# Altium PCB Over_current.PcbDoc
Units mm, origin at the board's own origin, x right, y up, seen from the top; angles counter-clockwise.
Board outline 50 x 100 mm, 2 copper layers (Top Layer, Bottom Layer); 16 components, 18 nets, 43 pads, 0 vias.
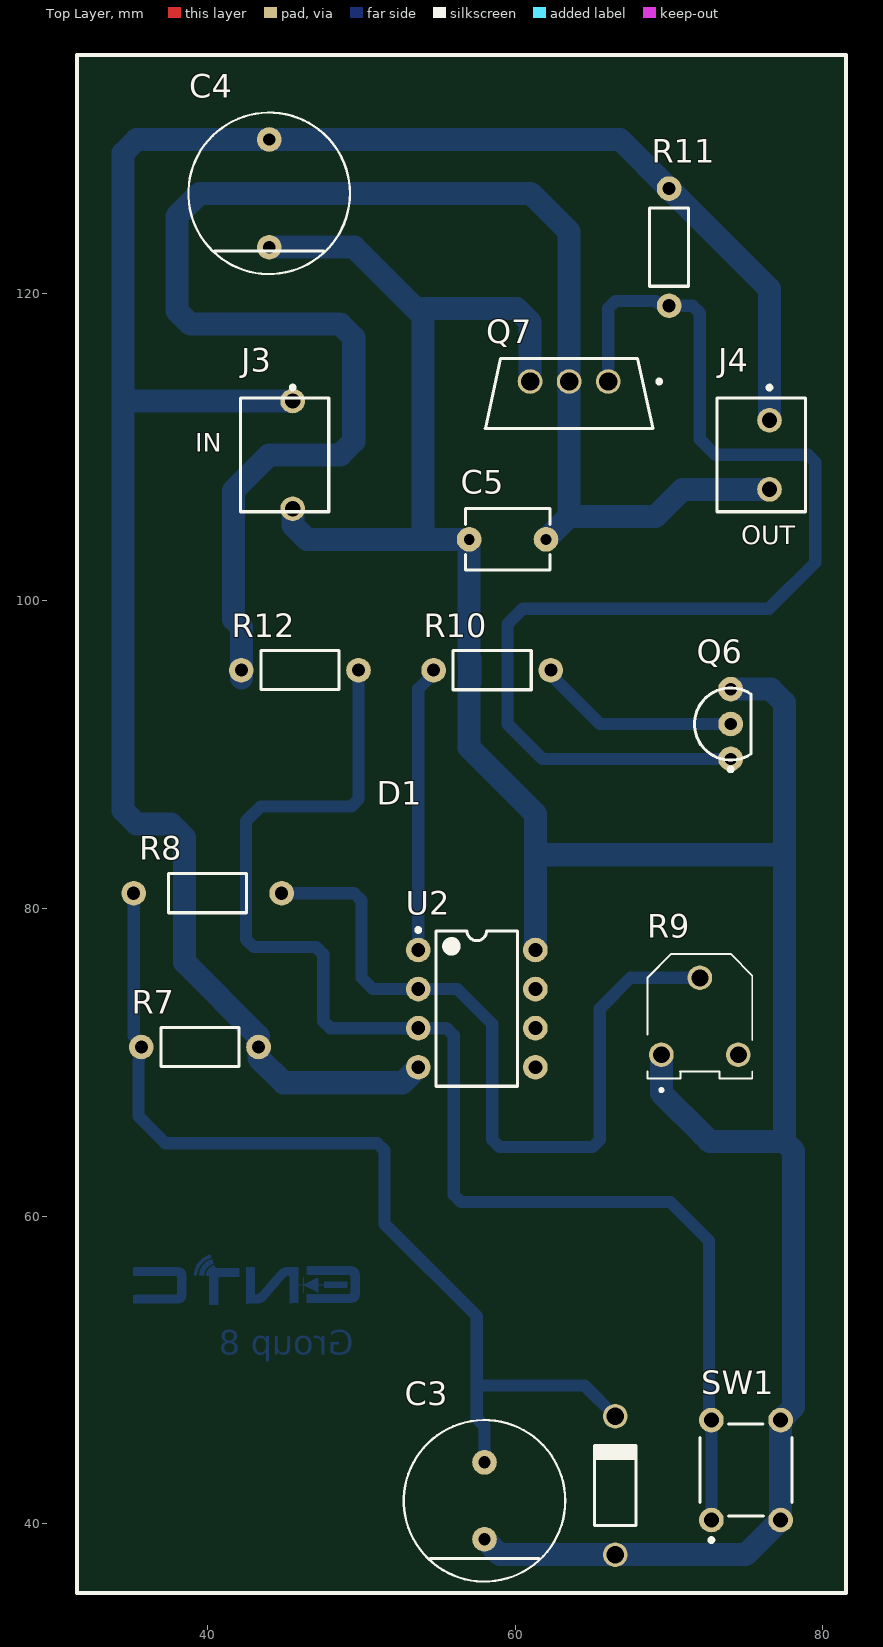
[diagram p0: Top Layer view]
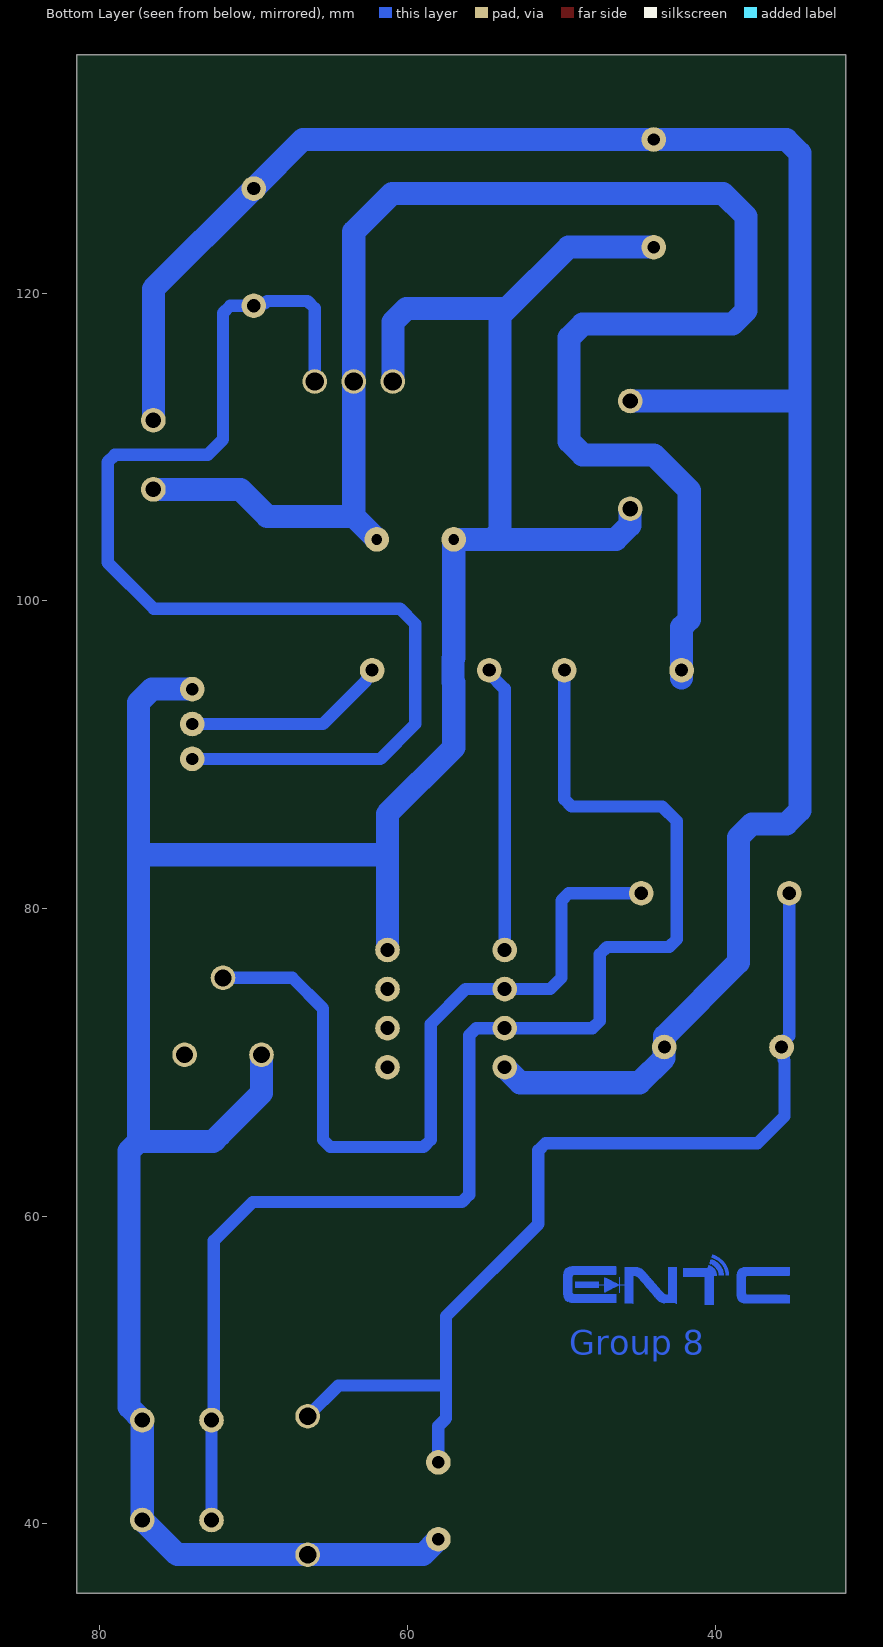
[diagram p1: Bottom Layer view, seen from below]

## Layer stack, top to bottom
Top Solder: solder mask 0.0102, Solder Resist, Dk 3.5
Top Layer: signal copper 0.0356
Dielectric 1: dielectric 0.32, FR-4, Dk 4.8
Bottom Layer: signal copper 0.0356
Bottom Solder: solder mask 0.0102, Solder Resist, Dk 3.5

## Board outline
31.5,35.5 31.5,135.5 81.5,135.5 81.5,35.5

## Design rules (kind name [scope] priority, off if disabled: settings)
Clearance Clearance_power_nets [(InNet('GND') OR InNet('Power_net1') OR InNet('Power_net2'))] p1: gap=0.3 ignorepadtopadclearanceinfootprint=FALSE except(0: Arc-Hole Track-Hole SMDPad-Hole THPad-Hole Via-Hole Fill-Hole Poly-Hole Region-Hole Text-Hole)
Clearance [All] p2: gap=0.254 ignorepadtopadclearanceinfootprint=FALSE except(0: Arc-Hole Track-Hole SMDPad-Hole THPad-Hole Via-Hole Fill-Hole Poly-Hole Region-Hole Text-Hole)
PolygonConnect [All] p1: connectstyle=Relief reliefconductorwidth=0.254 reliefentries=4 polygonreliefangle="90 Angle" airgapwidth=0.254
RoutingVias [All] p1: holewidth=0.711 width=1.27 viastyle="Through Hole" minholewidth=0.711 minwidth=1.27 maxholewidth=0.711 maxwidth=1.27
SolderMaskExpansion [All] p1: expansion=0.102 istentingtop=FALSE
Width Power_nets [(InNet('GND') OR InNet('Power_net1') OR InNet('Power_net2'))] p1: maxlimit=3 minlimit=0.254 preferedwidth=1.5
Width [All] p2: maxlimit=2 minlimit=0.254 preferedwidth=0.8
30 further rules are at their usual default settings.

## Components (designator, comment, footprint, x,y, rotation, side; value= is the part's Value field where it differs from the comment)
C3 "10uF" FP-RAD-TH-D_10_0_5-L_20_2-MFG#1 58,41.5 r90 top
C4 "220uF" FP-RAD-TH-D_10_0_5-L_20_2-MFG#2 44,126.5 r90 top
C5 "22uF" FP-RCEWM1-MFG 59.5,104 r180 top
D1 "1N4738" FAIR-DO-41-2_V 66.5,42.5 r90 top
J3 "In" FP-B2B-XH-A_LF_SN-MFG#1 45,109.5 r270 top
J4 "Out" FP-B2B-XH-A_LF_SN-MFG#2 76,109.5 r270 top
Q6 "P2N2222AG" ONSC-TO-92-3-29-11 74,92 r90 top
Q7 "IRFZ44ZPBF" FP-PG-TO220-3-MFG 63.5,113.5 r270 top
R7 "330 ohm" OMTE-WLA-2_V2#1 39.5,71 r0 top
R8 "1K" OMTE-WLA-2_V2#2 40,81 r180 top
R9 "2K" TRIM_3306F-1-104 72,73 r270 top
R10 "1K" OMTE-WLA-2_V2#1 58.5,95.5 r180 top
R11 "1K" OMTE-WLA-2_V2#1 70,123 r270 top
R12 "10K" OMTE-WLA-2_V2#1 46,95.5 r0 top
SW1 "1825910-6" TECO-1825910-6_V 75,43.5 r90 top
U2 "LM2904N" ONSC-PDIP-8-626-05_M 57.5,73.5 r0 top

## Footprints (in the part's own frame and the unit in brackets; to place one, negate y for a bottom-side part, rotate by r counter-clockwise, add the part's x,y. Pads: shape width x height; smd on the part's side, far side on the other; paste and mask are expansions set on the pad)
FAIR-DO-41-2_V [mm] "2-Leads, Axial leaded, Body 2.72x5.2mm, Pin Spacing 9mm"
  round 1.6 hole 1.15: 1(-4.5,0) 2(4.5,0)
  silkscreen extent -2.6,-1.36 2.6,1.36, body extent -4.93,-1.36 4.93,1.36, height 2.71
FP-B2B-XH-A_LF_SN-MFG#1 [mm]
  round 1.6 hole 1 paste-1000 mask+0: 1(-3.5,0.525) 2(3.5,0.525)
  silkscreen extent -4.5,-2.87 3.7,2.88, body extent -3.8,-2.98 3.8,2.98, height 0.25
FP-B2B-XH-A_LF_SN-MFG#2 [mm]
  round 1.6 hole 1 paste-1000 mask+0: 1(-2.25,0.525) 2(2.25,0.525)
  silkscreen extent -4.5,-2.87 3.7,2.88, body extent -3.8,-2.98 3.8,2.98, height 0.25
FP-PG-TO220-3-MFG [mm]
  round 1.6 hole 1.2 paste-1000 mask+0: 1(-0.767,2.54) 2(-0.767,0) 3(-0.767,-2.54)
  silkscreen extent -2.27,-5.45 2.27,5.98, body extent -2.37,-5.55 2.37,5.55, height 0.25
FP-RAD-TH-D_10_0_5-L_20_2-MFG#1 [mm]
  round 1.6 hole 0.8 paste-1000 mask+0: 1(-2.5,0) 2(2.5,0)
  silkscreen extent -5.25,-5.25 5.25,5.25, body extent -5.35,-5.35 5.35,5.35, height 0.25
FP-RAD-TH-D_10_0_5-L_20_2-MFG#2 [mm]
  round 1.6 hole 0.8 paste-1000 mask+0: 1(-3.5,0) 2(3.5,0)
  silkscreen extent -5.25,-5.25 5.25,5.25, body extent -5.35,-5.35 5.35,5.35, height 0.25
FP-RCEWM1-MFG [mm]
  round 1.6 hole 0.7 paste-1000 mask+0: 1(-2.5,0) 2(2.5,0)
  silkscreen extent -2.75,-2 2.75,2, body extent -3.2,-2.1 3.2,2.1, height 0.25
OMTE-WLA-2_V2#1 [mm] "2-Leads, Axial leaded, Body 2.54x5.08mm, Pin Spacing 7.62mm"
  round 1.6 hole 0.85: 1(-3.81,0) 2(3.81,0)
  silkscreen extent -2.54,-1.27 2.54,1.27, body extent -4.11,-1.26 4.11,1.27, height 2.54
OMTE-WLA-2_V2#2 [mm] "2-Leads, Axial leaded, Body 2.54x5.08mm, Pin Spacing 7.62mm"
  round 1.6 hole 0.85: 1(-4.81,0) 2(4.81,0)
  silkscreen extent -2.54,-1.27 2.54,1.27, body extent -4.11,-1.26 4.11,1.27, height 2.54
ONSC-PDIP-8-626-05_M [mm] "DIP, 8-Leads, Body 10x7.1mm, Pitch 2.54mm"
  round 1.6 hole 0.9: 1(-3.81,3.81) 2(-3.81,1.27) 3(-3.81,-1.27) 4(-3.81,-3.81) 5(3.81,-3.81) 6(3.81,-1.27) 7(3.81,1.27) 8(3.81,3.81)
  silkscreen extent -3.93,-5.05 2.65,5.23, body extent -3.95,-5 3.95,5, height 5.33
ONSC-TO-92-3-29-11 [mm] "TO, 3-Leads, Body Dia 4.7mm, Pitch 1.27mm"
  round 1.6 hole 0.8: 1(-2.27,0) 2(0,0) 3(2.27,0)
  silkscreen extent -3.07,-1.34 2.35,2.35, body extent -2.35,-1.33 2.36,2.36, height 7.87
TECO-1825910-6_V [mm] "Switch, 4-Leads, Body 5.99x5.99mm"
  round 1.6 hole 0.99: 1(-3.25,2.25) 2(3.25,2.25) 3(-3.25,-2.25) 4(3.25,-2.25)
  silkscreen extent -4.67,-2.99 2.99,3, body extent -3,-2.99 2.99,3, height 5
TRIM_3306F-1-104 [mm]
  round 1.6 hole 1.1: 1(2.5,-2.5) 2(-2.5,0) 3(2.5,2.5)
  silkscreen extent -4.05,-3.41 4.9,3.41, body extent -3.2,-1.6 3.2,1.6, height 0.75

## Part data
C3: library part CMP-05427-001613-1, "Aluminum Electrolytic Capacitors (Radial Lead Type) 10uF ±20% 400V", Case/Package=Radial, Dielectric Material=Aluminium, Max Operating Temperature=105°C, Min Operating Temperature=-25°C, Package Quantity=200, Ripple Current=300mA, Tolerance=20%, Voltage=400V, Capacitance=10uF, Construction=RADIAL, Contact Plating=Tin, Diameter=10mm, Dissipation Factor=0.24%, Height=20mm, Height - Seated (Max)=0.787inch, Lead Diameter=0.6mm, Lead Free="Lead Free", Lead Pitch=5mm, Length=20mm, Life (Hours)=8000Hour, Mount="Through Hole", Number of Pins=2, Packaging=Bulk, Polarity=Polar, Radiation Hardening=No, REACH SVHC="No SVHC", Ripple Current (AC)=300mA, RoHS Compliant=Yes, Series=ED, Termination=Radial, Voltage Rating=400V, Voltage Rating (DC)=400V
C4: library part CMP-05427-001613-1, "Aluminum Electrolytic Capacitors (Radial Lead Type) 10uF ±20% 400V", Capacitance=10uF, Case/Package=Radial, Dielectric Material=Aluminium, Max Operating Temperature=105°C, Min Operating Temperature=-25°C, Package Quantity=200, Ripple Current=300mA, Tolerance=20%, Voltage=400V, Construction=RADIAL, Contact Plating=Tin, Diameter=10mm, Dissipation Factor=0.24%, Height=20mm, Height - Seated (Max)=0.787inch, Lead Diameter=0.6mm, Lead Free="Lead Free", Lead Pitch=5mm, Length=20mm, Life (Hours)=8000Hour, Mount="Through Hole", Number of Pins=2, Packaging=Bulk, Polarity=Polar, Radiation Hardening=No, REACH SVHC="No SVHC", Ripple Current (AC)=300mA, RoHS Compliant=Yes, Series=ED, Termination=Radial, Voltage Rating=400V, Voltage Rating (DC)=400V
C5: library part CMP-06035-003622-1, "CAP CER 22UF 25V X7R RADIAL", Case/Package=Radial, Dielectric=X7R, Max Operating Temperature=125°C, Min Operating Temperature=-55°C, Package Quantity=1500, Ratings=AEC-Q200, Resistor Type=Ceramic, Tolerance=20%, Voltage Rating=25V, Capacitance=22uF, Height=7.5mm, Height - Seated (Max)=0.295inch, Lead Diameter=0.5mm, Lead Pitch=0.197inch, Lead/Base Style="Formed Leads", Length=0.217inch, Mount="Through Hole", Packaging="Tape and Reel", Termination=Radial, Voltage Rating (DC)=25V, Width=0.157inch
D1: library part CMP-0892-00030-1, "Zener Diode, 4.7V, 1W, 5%, -65 to 200 degC, 2-Pin DO-41, Body 2.72 x 5.2 mm, RoHS", Manufacturer="Fairchild Semiconductor", Operating and Storage Temperature Range="-65 to 200 degC", PartNumber=1N4732A, Test Current IZ (mA)=53, Tolerance=5%, ComponentLink1Description="Manufacturer URL", ComponentLink1URL=http://www.fairchildsemi.com/, ComponentLink2Description=Datasheet, ComponentLink2URL=http://www.fairchildsemi.com/ds/1N/1N4744A.pdf, ComponentLink3Description="Package Specification", ComponentLink3URL=http://www.fairchildsemi.com/dwg/DO/DO41A.pdf, DatasheetVersion="Rev. H3", IR (uA)=10, Mounting Technology="Through Hole", PackageDescription="2-Pin Axial leaded, Body 2.72 x 5.2 mm, Lead Spread 25.4 mm", PackageReference=DO-41-2, PackageVersion="Rev. 2", PD (W)=1, RoHS=TRUE, VZ (Max.) (V)=4.935, VZ (Min.) (V)=4.465, ZZ (Max) (ohm)=8
J3 J4: library part CMP-2000-05888-3, "CONN HEADER VERT 2POS 2.5MM", Color=Natural, Contact Resistance=20mR, Current Rating=3A, Housing Color=White, Insulation Resistance=1GR, Max Operating Temperature=85°C, Max Voltage Rating (AC)=250V, Min Operating Temperature=-25°C, Connector Type="Male Pin", Contact Material=Brass, Contact Plating=Tin, Contact Type="Male Pin", Depth=5.75mm, Fastening Type=Detent, Housing Material=Polyamide, Lead Free="Lead Free", Lead Pitch=2.5mm, Length=7.4mm, Max Current Rating=3A, Max Voltage Rating (DC)=250V, Mount="Through Hole", Number of Contacts=2, Number of Positions=2, Number of Rows=1, Orientation=Straight, Packaging=Bulk, Pitch=2.5mm, REACH SVHC="No SVHC", Series=XH, Termination=Solder, Voltage Rating=250V, Voltage Rating (AC)=250V, Wire/Cable Gauge=22AWG
Q6: library part CMP-1048-01402-1, "Amplifier Transistor, NPN Silicon, 3-Pin TO-92, Pb-Free, Bulk Box", Manufacturer="On Semiconductor", ComponentLink1Description="Manufacturer URL", ComponentLink1URL=http://www.onsemi.com/, ComponentLink2Description=Datasheet, ComponentLink2URL=http://www.onsemi.com/pub_link/Collateral/P2N2222A-D.PDF, ComponentLink3Description="Package Specification", ComponentLink3URL=http://www.onsemi.cn/pub_link/Collateral/2N6426-D.PDF, DatasheetVersion="Rev. 7", fT Min (MHz)=300, IC Continuous (A)=0.6, Mounting Technology="Through Hole", PackageDescription="3-Pin Transistor Outline, Body 4.825 x 3.685 mm, Pitch 1.27 mm", PackageReference=TO-92-3-29-11_AM_SL, PackageVersion="Rev. AM", Packing="Bulk Box", PartNumber=P2N2222AG, Polarity=NPN, RoHS=TRUE
Q7: library part CMP-32901-000501-1, "MOSFET N-CH 55V 51A TO220AB", Case/Package=TO-220, Continuous Drain Current (ID)=51A, Drain to Source Breakdown Voltage=55V, Drain to Source Resistance=13.9mR, Gate to Source Voltage (Vgs)=20V, Input Capacitance=1.42nF, Max Operating Temperature=175°C, Max Power Dissipation=80W, Min Operating Temperature=-55°C, Threshold Voltage=4V, Drain to Source Voltage (Vdss)=55V, Halogen Free="Halogen Free", Height=0.38inch, Lead Free="Lead Free", Length=0.42inch, Max Dual Supply Voltage=55V, Mount="Through Hole", Number of Pins=3, Packaging=Rail/Tube, Power Dissipation=80W, Rds On Max=13.9mR, REACH SVHC="No SVHC", RoHS Compliant=Yes, Turn-Off Delay Time=33ns, Turn-On Delay Time=14ns, Width=0.19inch
R7 R8 R10 R11 R12: library part CMP-1237-00001-1, "Miniature Wirewound Current Sense, 0.02 Ohm +/-1%, 0.5 W, 2-Pin THD, RoHS, 25pc Pack", Manufacturer=Ohmite, PartNumber=WLAR020FE, Power Rating="0.5 W", Rated Resistance="0.02 Ohm", Resistance Tolerance=+/-1%, ComponentLink1Description="Manufacturer URL", ComponentLink1URL=http://www.ohmite.com/, ComponentLink2Description=Datasheet, ComponentLink2URL=http://www.ohmite.com/cat/res_wl.pdf, ComponentLink3Description="Package Specification", ComponentLink3URL=http://www.ohmite.com/cat/res_wl.pdf, DatasheetVersion=May-14, Mounting Technology="Through Hole", PackageDescription="2-Pin Axial Lead, Body 5.08 x 2.54 mm, Lead Spread 25 mm", Packing="25pc Pack", RoHS=TRUE
R9: library part 3306F-1-104, "100 kOhms 0.2W, 1/5W PC Pins Through Hole Trimmer Potentiometer Cermet 1 Turn Top Adjustment", Package="6432 Bourns", Availability=Unavailable, Check_prices=https://www.snapeda.com/parts/3306F-1-104/Bourns/view-part/372285/?ref=eda, MF=Bourns, MP=3306F-1-104, Price=None, SnapEDA_Link=https://www.snapeda.com/parts/3306F-1-104/Bourns/view-part/372285/?ref=snap
SW1: library part CMP-1684-00021-1, "Tact Switch, SPST-NO, 0.05 A, -35 to 85 degC, 4-Pin THD, RoHS, Bulk", Actuator Color=Black, Contact Rating @ Voltage=0.05A@24VDC, Dielectric Strength=500VAC, Manufacturer="TE Connectivity", Maximum AC Voltage Rating=N/A, Maximum Contact Resistance=100mOhm, Maximum DC Voltage Rating=24V, Minimum Insulation Resistance=100MOhm, Operating Temperature=-35to85C, Package Description="4-Pin Through Hole Device, Body 5.99 x 5.99 mm, Pitch 6.5 mm", Package Reference=THD, Actuator Length=1.4mm, Actuator Material=PolybutyleneTerephthalate, Actuator Style=RoundButton, Base Material=N/A, Body Orientation=Straight, Bushing Type=Unthreaded, Contact Material=CopperAlloy, Contact Plating=Silver, Datasheet URL=http://www.te.com/commerce/DocumentDelivery/DDEController?Action=showdoc&DocId=Customer+Drawing%7F1825910%7FC9%7Fpdf%7FEnglish%7FENG_CD_1825910_C9.pdf%7F1825910-6, Datasheet Version="Rev. C9", Dimension=5.99x5mm, Electrical Life=100000Cycles, Family=1825910, Function=MomentaryContact, Housing Material=N/A, Illumination=N/R, Manufacturer URL=http://www.te.com, Mechanical Life=100000Cycles, Mounting=ThroughHole, Packaging=N/A, Part No=1825910-6, Pole Throw Configuration=SPST, Product Weight=N/A, RoHS=Yes, Seal Description=N/A, Seal Location=N/A, Switch Configuration=OFF(ON), Terminal Type=PCPins, Thread Size=N/R
U2: library part CMP-1310-00111-1, "Single Supply Dual Operational Amplifier, 3 to 32 V, -40 to 105 degC, 8-Pin PDIP, Tube", Manufacturer="On Semiconductor", ComponentLink1Description="Manufacturer URL", ComponentLink1URL=http://www.onsemi.com/, ComponentLink2Description=Datasheet, ComponentLink2URL=http://www.onsemi.cn/pub_link/Collateral/LM358-D.PDF, ComponentLink3Description="Package Specification", ComponentLink3URL=http://www.onsemi.com/pub_link/Collateral/LM211-D.PDF, DatasheetVersion="Rev. 27", Mounting Technology="Through Hole", PackageDescription="8-Pin Plastic Dual-In Line Package, Body 9.52 x 6.605 mm, Pitch 2.54 mm", PackageReference=PDIP-8-626-05, PackageVersion="Rev. M, 04/2010", Packing=Tube, PartNumber=LM2904N, RoHS=FALSE, VCC Max (V)=32, VCC Min (V)=3

## Nets (pads, with @x,y where several pads share a name; then routed paths per layer and width w, separated by ;. In a path a pad name is that pad's centre, name@x,y a point inside that pad or via, vN(x,y) a via of type N, cw(c..) or ccw(c..) an arc to the next point about the centre after c; other vN are vias at no path point)
GND: C3.1 C4.1 C5.2 D1.1 J3.2 Q6.3 Q7.3 R9.1 SW1.3 SW1.4 U2.8 | length 185.9
  Bottom Layer w1.5: C4.1@44.046,123 49.54,123 53.54,119 ; J3.2 45.544,105.981 45.544,104.91 46.454,104 54.5,104 ; C3.1 59,38 D1.1@66.473,38 ; Q7.3 60.96,118.121 60.081,119 53.54,119 ; U2.8 61.31,83.69 ; D1.1 66.519,38.019 69.781,38.019 69.8,38 74.973,38 77.223,40.25 SW1.3 SW1.4 78.1,47.6 78.1,64.251 77.5,64.851 ; R9.1 69.5,68 72.21,65.29 72.649,64.851 77.5,64.851 ; Q6.3@74.031,94.266 76.621,94.266 77.5,93.387 77.5,83.5 ; 53.54,119 54,118.54 54,104.5 54.5,104 ; 54.5,104 C5.2 57,96.306 57.04,96.266 57.04,94.734 57,94.694 57,90.466 61.31,86.156 61.31,83.69 ; 61.31,83.69 61.5,83.5 77.5,83.5 ; 77.5,64.851 77.5,83.5
NetC3_2: C3.2 D1.2 R7.1 R8.2 | length 64.5
  Bottom Layer w0.8: R8.2 35.19,71.717 35.69,71.216 R7.1 35.537,70.847 35.537,70.168 35.5,70.131 35.5,66.5 37.25,64.75 51.031,64.75 51.5,64.281 51.5,59.5 57.5,53.5 57.5,49 ; C3.2 58,46.358 57.5,46.858 57.5,49 ; D1.2 64.5,49 57.5,49
NetQ1_2: 
NetQ1_3: 
NetQ2_3: 
NetQ4_2: 
NetQ5_2: 
NetQ6_1: Q6.1 Q7.1 R11.2 | length 77.5
  Bottom Layer w0.8: Q7.1 66.04,119.031 66.509,119.5 69.131,119.5 69.288,119.343 R11.2@69.847,119.343 ; R11.2 71.531,119.19 72,118.721 72,110.5 73,109.5 79.031,109.5 79.5,109.031 79.5,102.5 76.5,99.5 60.5,99.5 59.5,98.5 59.5,92 61.77,89.73 Q6.1
NetQ6_2: Q6.2 R10.1 | length 13.3
  Bottom Layer w0.8: R10.1 62.31,95.284 62.71,94.884 62.71,94.79 65.5,92 Q6.2
NetR3_1: 
NetR8_1: R8.1 R9.2 U2.2 | length 50.9
  Bottom Layer w0.8: R8.1 49.531,81 50,80.531 50,75.5 50.73,74.77 U2.2 56.23,74.77 58.5,72.5 58.5,64.969 58.969,64.5 65.031,64.5 65.5,64.969 65.5,73.5 67.5,75.5 R9.2
NetR10_2: R10.2 U2.1 | length 18.6
  Bottom Layer w0.8: U2.1 53.69,94.284 54.69,95.284 R10.2
Power_line_Reg: 
Power_line_Un_reg: 
Power_net1: C4.2 J3.1 J4.1 R7.2 R11.1 U2.4 | length 141.2
  Bottom Layer w1.5: 34.5,113 J3.1 ; R7.2 43.291,71.019 43.291,71.709 38.5,76.5 38.5,84.621 37.621,85.5 35.379,85.5 34.5,86.379 34.5,111.75 34.5,112.379 34.5,129.121 35.379,130 C4.2 66.81,130 R11.1 76.525,120.285 J4.1 ; R7.2@43.311,71 43.329,70.982 43.329,70.282 44.934,68.678 52.678,68.678 U2.4
Power_net2: C5.1 J4.2 Q7.2 R12.1 | length 108.1
  Bottom Layer w1.5: R12.1@42.19,95 R12.1 42.19,98.3 41.69,98.8 41.69,107.19 44,109.5 48.621,109.5 49.5,110.379 49.5,117.121 48.621,118 38.879,118 38,118.879 38,125 39.5,126.5 61,126.5 63.5,124 Q7.2 63.5,105.5 ; C5.1 63.5,105.5 ; J4.2 70.874,107.25 69.124,105.5 63.5,105.5
Ref: 
ref_to_current: R12.2 SW1.1 SW1.2 U2.3 | length 88.5
  Bottom Layer w0.8: R12.2@49.81,95 49.81,87.111 49.341,86.642 43.453,86.642 42.5,85.69 42.5,78 43,77.5 47.041,77.5 47.509,77.031 47.509,72.699 47.978,72.23 U2.3 55.531,72.23 56,71.761 56,61.397 56.469,60.929 70.071,60.929 72.597,58.403 72.597,46.903 SW1.2 SW1.1
pads on no net: R9.3 U2.5 U2.6 U2.7

## Other copper
Bottom Layer:
  region: 203 vertices and 0 holes, not listed, extent 39.122,56.154 40.232,57.481
  region: 40.68,54.55 40.68,56.077 42.068,56.077 42.068,56.633 40.479,56.633 40.479,56.679 40.464,56.679 40.464,56.725 40.448,56.725 40.448,56.771 40.433,56.771 40.433,56.802 40.387,56.802 40.387,56.787 40.34,56.787 40.34,56.771 40.31,56.771 40.31,56.756 40.279,56.756 40.279,56.741 40.248,56.741 40.248,56.725 40.232,56.725 40.232,56.71 40.202,56.71 40.202,56.694 40.186,56.694 40.186,56.679 40.155,56.679 40.155,56.663 40.14,56.663 40.14,56.648 40.124,56.648 40.124,56.633 40.109,56.633 40.109,56.617 40.094,56.617 40.094,56.602 40.078,56.602 40.078,56.586 40.063,56.586 40.063,56.571 40.047,56.571 40.047,56.555 40.032,56.555 40.032,56.525 40.016,56.525 40.016,56.509 40.001,56.509 40.001,56.478 39.986,56.478 39.986,56.447 39.97,56.447 39.97,56.417 39.955,56.417 39.955,56.386 39.939,56.386 39.939,56.339 39.924,56.339 39.924,56.278 39.908,56.278 39.908,56.139 40.094,56.139 40.094,54.272 40.109,54.272 40.109,54.257 40.68,54.257 40.68,54.534
  region: 157 vertices and 0 holes, not listed, extent 39.461,56.154 40.371,57.188
  region: 37.733,54.889 35.311,54.889 35.311,54.874 35.172,54.874 35.172,54.334 38.072,54.334 38.072,54.349 38.165,54.349 38.165,54.365 38.227,54.365 38.227,54.38 38.273,54.38 38.273,54.395 38.304,54.395 38.304,54.411 38.335,54.411 38.335,54.426 38.365,54.426 38.365,54.442 38.381,54.442 38.381,54.457 38.412,54.457 38.412,54.473 38.427,54.473 38.427,54.488 38.443,54.488 38.443,54.503 38.458,54.503 38.458,54.519 38.473,54.519 38.473,54.534 38.489,54.534 38.489,54.565 38.504,54.565 38.504,54.581 38.52,54.581 38.52,54.611 38.535,54.611 38.535,54.642 38.551,54.642 38.551,54.673 38.566,54.673 38.566,54.719 38.581,54.719 38.581,54.812 38.597,54.812 38.597,56.216 38.581,56.216 38.581,56.309 38.566,56.309 38.566,56.355 38.551,56.355 38.551,56.386 38.535,56.386 38.535,56.417 38.52,56.417 38.52,56.447 38.504,56.447 38.504,56.478 38.489,56.478 38.489,56.494 38.473,56.494 38.473,56.509 38.458,56.509 38.458,56.525 38.443,56.525 38.443,56.54 38.427,56.54 38.427,56.555 38.412,56.555 38.412,56.571 38.381,56.571 38.381,56.586 38.365,56.586 38.365,56.602 38.335,56.602 38.335,56.617 38.304,56.617 38.304,56.633 38.257,56.633 38.257,56.648 38.227,56.648 38.227,56.663 38.165,56.663 38.165,56.679 38.072,56.679 38.072,56.694 35.172,56.694 35.172,56.154 35.187,56.154 35.187,56.139 37.964,56.139 37.964,56.123 37.98,56.123 37.98,56.108 37.995,56.108 37.995,56.077 38.011,56.077 38.011,54.951 37.995,54.951 37.995,54.92 37.98,54.92 37.98,54.905 37.949,54.905 37.949,54.889 37.748,54.889
  region: 589 vertices and 0 holes, not listed, extent 42.5,54.318 49.089,56.694
  region: 46.79,54.92 46.45,54.92 46.45,54.365 49.228,54.365 49.228,54.38 49.382,54.38 49.382,54.395 49.444,54.395 49.444,54.411 49.505,54.411 49.505,54.426 49.552,54.426 49.552,54.442 49.582,54.442 49.582,54.457 49.613,54.457 49.613,54.473 49.644,54.473 49.644,54.488 49.66,54.488 49.66,54.503 49.69,54.503 49.69,54.519 49.706,54.519 49.706,54.534 49.721,54.534 49.721,54.55 49.737,54.55 49.737,54.565 49.752,54.565 49.752,54.581 49.768,54.581 49.768,54.611 49.783,54.611 49.783,54.627 49.798,54.627 49.798,54.658 49.814,54.658 49.814,54.689 49.829,54.689 49.829,54.735 49.845,54.735 49.845,54.781 49.86,54.781 49.86,54.889 49.876,54.889 49.876,56.231 49.86,56.231 49.86,56.339 49.845,56.339 49.845,56.386 49.829,56.386 49.829,56.432 49.814,56.432 49.814,56.463 49.798,56.463 49.798,56.494 49.783,56.494 49.783,56.509 49.768,56.509 49.768,56.525 49.752,56.525 49.752,56.555 49.737,56.555 49.737,56.571 49.721,56.571 49.721,56.586 49.69,56.586 49.69,56.602 49.675,56.602 49.675,56.617 49.66,56.617 49.66,56.633 49.629,56.633 49.629,56.648 49.613,56.648 49.613,56.663 49.567,56.663 49.567,56.679 49.536,56.679 49.536,56.694 49.49,56.694 49.49,56.71 49.428,56.71 49.428,56.725 49.336,56.725 49.336,56.741 46.466,56.741 46.466,56.725 46.45,56.725 46.45,56.216 46.466,56.216 46.466,56.185 49.228,56.185 49.228,56.17 49.243,56.17 49.243,56.154 49.258,56.154 49.258,56.139 49.274,56.139 49.274,56.108 49.289,56.108 49.289,54.997 49.274,54.997 49.274,54.966 49.258,54.966 49.258,54.951 49.228,54.951 49.228,54.935 49.181,54.935 49.181,54.92 46.805,54.92
  text "Group 8" at 49.5,51 h1.6

## Silkscreen, mask and mechanical layers (free items; w line width, h text height)
Top Overlay:
  the board outline again, w0.254
  text "IN" at 39.2,109.7 h1.2
  text "OUT" at 74.7,103.7 h1.2